# EAGLE board Slinea_velocistaEdu (EAGLE 6.4)
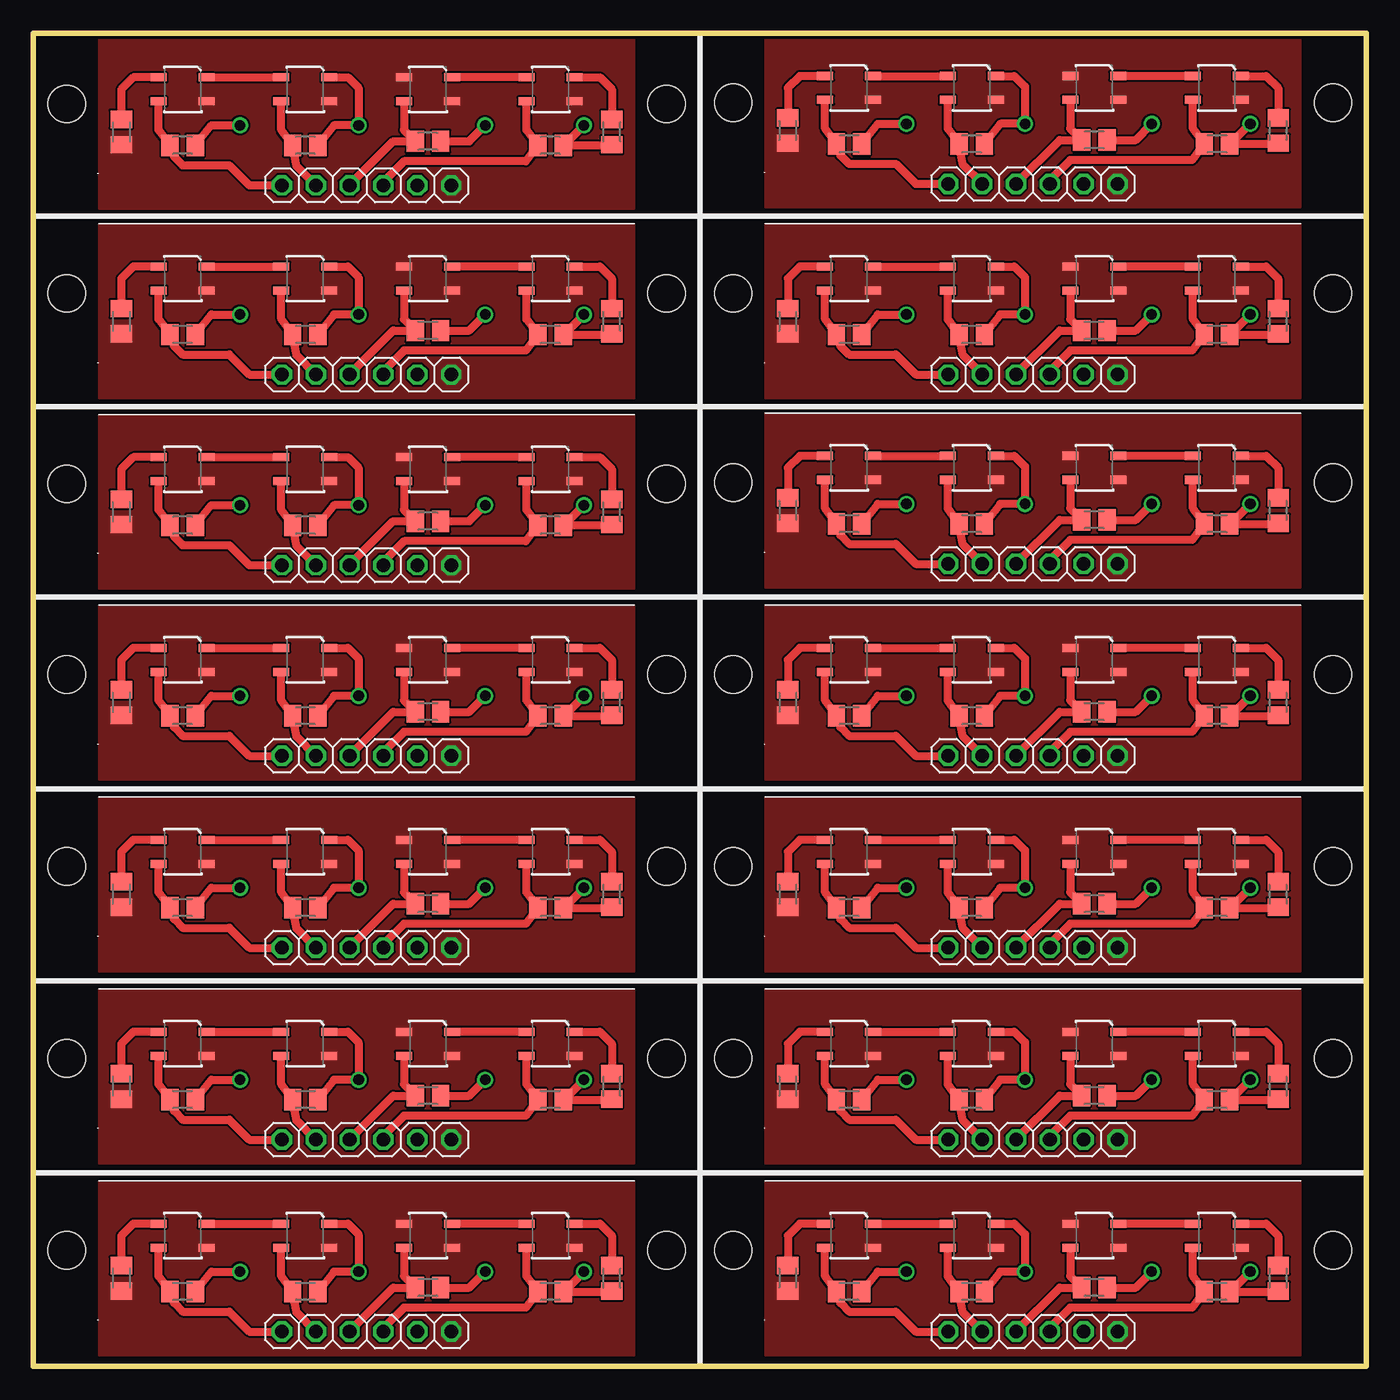
[diagram p0: board, top side]
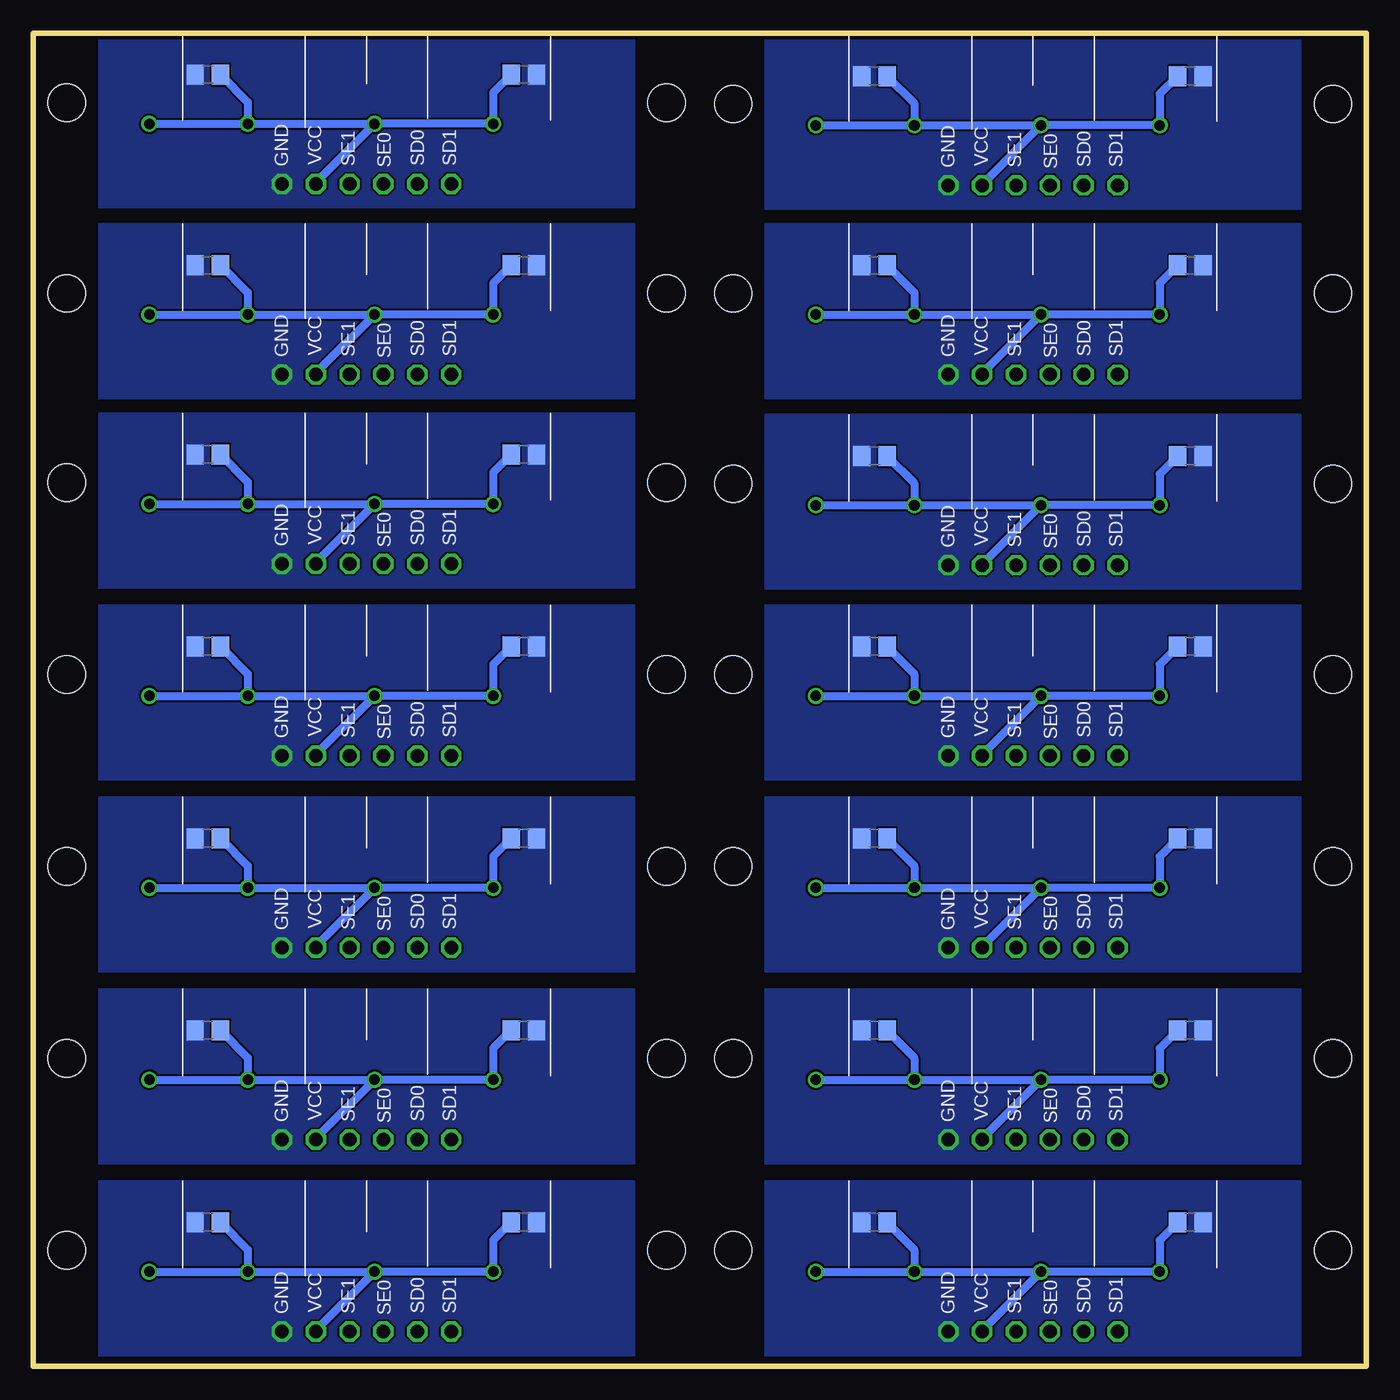
[diagram p1: board, bottom side, seen from below]

Size 100 x 100 mm. Coordinates in mm from the lower left corner, seen from the top.
Outline: 0,0 50,0 100,0 100,14.5 100,28.9 100,43.3 100,57.7 100,72 100,86.3 100,100 50,100 0,100 0,86.3 0,72 0,57.7 0,43.3 0,28.9 0,14.5 0,0
Copper layers (1*16): Top 0.035mm / dielectric 1.5mm / Bottom 0.035mm
Design rules "Fusion_eagle_rule_v1.1": minimum track width 6mil, minimum drill 12mil, track to track 6mil, track to pad 6mil, pad to pad 6mil, via to via 6mil, smd to smd 0mil, copper to edge 10mil, drill to drill 10mil, minimum pad ring 10mil, minimum via ring 6mil, stop-mask expansion 2mil, vias tented up to drill 100mil, thermal gap 10mil
Holes 2.8 mm at 2.5,8.7 47.5,8.7 52.5,8.7 97.5,8.7 2.5,23.1 47.5,23.1 52.5,23.1 97.5,23.1 2.5,37.5 47.5,37.5 52.5,37.5 97.5,37.5 2.5,51.9 47.5,51.9 52.5,51.9 97.5,51.9 2.5,66.2 47.5,66.2 52.5,66.3 97.5,66.3 2.5,80.5 47.5,80.5 52.5,80.5 97.5,80.5 2.5,94.7 47.5,94.7 52.5,94.8 97.5,94.8

## Footprints (pad centres in the part's own frame; a part is rotated, then mirrored left to right if it is on the bottom)
C0805 = smd 1.3 x 1.5: 1 -0.95,0; 2 0.95,0
1X06 = drill 1.016 octagon: 1 -6.35,0; 2 -3.81,0; 3 -1.27,0; 4 1.27,0; 5 3.81,0; 6 6.35,0
M0805 = smd 1.3 x 1.6: 1 -0.95,0; 2 0.95,0
QRE1113 = smd 1.2 x 0.6: 1 -1.8,-0.9; 2 1.8,-0.9; 3 1.8,0.9; 4 -1.8,0.9

## Placement (x,y rotation side)
CS1  [C0805]  86.9,10.8 180 bottom
CS2  [C0805]  63.2,10.8 0 bottom
CS3  [C0805]  36.9,10.8 180 bottom
CS4  [C0805]  13.2,10.8 0 bottom
CS5  [C0805]  36.9,25.2 180 bottom
CS6  [C0805]  13.2,25.2 0 bottom
CS7  [C0805]  86.9,25.2 180 bottom
CS8  [C0805]  63.2,25.2 0 bottom
CS9  [C0805]  36.9,39.6 180 bottom
CS10  [C0805]  13.2,39.6 0 bottom
CS11  [C0805]  86.9,39.6 180 bottom
CS12  [C0805]  63.2,39.6 0 bottom
CS13  [C0805]  36.9,54 180 bottom
CS14  [C0805]  13.2,54 0 bottom
CS15  [C0805]  86.9,54 180 bottom
CS16  [C0805]  63.2,54 0 bottom
CS17  [C0805]  36.9,68.3 180 bottom
CS18  [C0805]  13.2,68.3 0 bottom
CS19  [C0805]  86.9,68.4 180 bottom
CS20  [C0805]  63.2,68.4 0 bottom
CS21  [C0805]  36.9,82.6 180 bottom
CS22  [C0805]  13.2,82.6 0 bottom
CS23  [C0805]  86.9,82.6 180 bottom
CS24  [C0805]  63.2,82.6 0 bottom
CS25  [C0805]  36.9,96.8 180 bottom
CS26  [C0805]  13.2,96.8 0 bottom
CS27  [C0805]  86.9,96.9 180 bottom
CS28  [C0805]  63.2,96.9 0 bottom
JP1  [1X06]  75,2.6 0 top
JP2  [1X06]  25,17 0 top
JP3  [1X06]  75,17 0 top
JP4  [1X06]  25,31.4 0 top
JP5  [1X06]  75,31.4 0 top
JP6  [1X06]  25,45.8 0 top
JP7  [1X06]  75,45.8 0 top
JP8  [1X06]  25,60.1 0 top
JP9  [1X06]  75,60.2 0 top
JP10  [1X06]  25,2.6 0 top
JP11  [1X06]  25,74.4 0 top
JP12  [1X06]  75,74.4 0 top
JP13  [1X06]  25,88.6 0 top
JP14  [1X06]  75,88.7 0 top
R1  [M0805]  88.8,5.6 0 top
R2  [M0805]  79.6,5.9 0 top
R3  [M0805]  70.4,5.6 0 top
R4  [M0805]  61.2,5.6 0 top
R5  [M0805]  38.8,20 0 top
R6  [M0805]  29.6,20.3 0 top
R7  [M0805]  20.4,20 0 top
R8  [M0805]  11.2,20 0 top
R9  [M0805]  88.8,20 0 top
R10  [M0805]  79.6,20.3 0 top
R11  [M0805]  70.4,20 0 top
R12  [M0805]  61.2,20 0 top
R13  [M0805]  38.8,34.4 0 top
R14  [M0805]  29.6,34.7 0 top
R15  [M0805]  20.4,34.4 0 top
R16  [M0805]  11.2,34.4 0 top
R17  [M0805]  88.8,34.4 0 top
R18  [M0805]  79.6,34.7 0 top
R19  [M0805]  70.4,34.4 0 top
R20  [M0805]  38.8,5.6 0 top
R21  [M0805]  29.6,5.9 0 top
R22  [M0805]  20.4,5.6 0 top
R23  [M0805]  11.2,5.6 0 top
R24  [M0805]  61.2,34.4 0 top
R25  [M0805]  38.8,48.8 0 top
R26  [M0805]  29.6,49.1 0 top
R27  [M0805]  20.4,48.8 0 top
R28  [M0805]  11.2,48.8 0 top
R29  [M0805]  88.8,48.8 0 top
R30  [M0805]  79.6,49.1 0 top
R31  [M0805]  70.4,48.8 0 top
R32  [M0805]  61.2,48.8 0 top
R33  [M0805]  38.8,63.1 0 top
R34  [M0805]  29.6,63.4 0 top
R35  [M0805]  20.4,63.1 0 top
R36  [M0805]  11.2,63.1 0 top
R37  [M0805]  88.8,63.2 0 top
R38  [M0805]  79.6,63.5 0 top
R39  [M0805]  70.4,63.2 0 top
R40  [M0805]  61.2,63.2 0 top
R41  [M0805]  38.8,77.4 0 top
R42  [M0805]  29.6,77.7 0 top
R43  [M0805]  20.4,77.4 0 top
R44  [M0805]  11.2,77.4 0 top
R45  [M0805]  88.8,77.4 0 top
R46  [M0805]  79.6,77.7 0 top
R47  [M0805]  70.4,77.4 0 top
R48  [M0805]  61.2,77.4 0 top
R49  [M0805]  38.8,91.6 0 top
R50  [M0805]  29.6,91.9 0 top
R51  [M0805]  20.4,91.6 0 top
R52  [M0805]  11.2,91.6 0 top
R53  [M0805]  88.8,91.7 0 top
R54  [M0805]  79.6,92 0 top
R55  [M0805]  70.4,91.7 0 top
R56  [M0805]  61.2,91.7 0 top
RP1  [M0805]  93.4,6.6 270 top
RP2  [M0805]  56.6,6.6 90 top
RP3  [M0805]  43.4,6.6 270 top
RP4  [M0805]  6.6,6.6 90 top
RP5  [M0805]  43.4,21 270 top
RP6  [M0805]  6.6,21 90 top
RP7  [M0805]  93.4,21 270 top
RP8  [M0805]  56.6,21 90 top
RP9  [M0805]  43.4,35.4 270 top
RP10  [M0805]  6.6,35.4 90 top
RP11  [M0805]  93.4,35.4 270 top
RP12  [M0805]  56.6,35.4 90 top
RP13  [M0805]  43.4,49.8 270 top
RP14  [M0805]  6.6,49.8 90 top
RP15  [M0805]  93.4,49.8 270 top
RP16  [M0805]  56.6,49.8 90 top
RP17  [M0805]  43.4,64.1 270 top
RP18  [M0805]  6.6,64.1 90 top
RP19  [M0805]  93.4,64.2 270 top
RP20  [M0805]  56.6,64.2 90 top
RP21  [M0805]  43.4,78.4 270 top
RP22  [M0805]  6.6,78.4 90 top
RP23  [M0805]  93.4,78.4 270 top
RP24  [M0805]  56.6,78.4 90 top
RP25  [M0805]  43.4,92.6 270 top
RP26  [M0805]  6.6,92.6 90 top
RP27  [M0805]  93.4,92.7 270 top
RP28  [M0805]  56.6,92.7 90 top
U$1  QRE1113  [QRE1113]  88.8,9.8 180 top
U$2  QRE1113  [QRE1113]  38.8,9.8 180 top
U$3  QRE1113  [QRE1113]  79.6,9.8 180 top
U$4  QRE1113  [QRE1113]  29.6,9.8 180 top
U$5  QRE1113  [QRE1113]  70.4,9.8 180 top
U$6  QRE1113  [QRE1113]  61.2,9.8 180 top
U$7  QRE1113  [QRE1113]  20.4,9.8 180 top
U$8  QRE1113  [QRE1113]  38.8,24.2 180 top
U$9  QRE1113  [QRE1113]  29.6,24.2 180 top
U$10  QRE1113  [QRE1113]  11.2,9.8 180 top
U$11  QRE1113  [QRE1113]  20.4,24.2 180 top
U$12  QRE1113  [QRE1113]  11.2,24.2 180 top
U$13  QRE1113  [QRE1113]  88.8,24.2 180 top
U$14  QRE1113  [QRE1113]  79.6,24.2 180 top
U$15  QRE1113  [QRE1113]  70.4,24.2 180 top
U$16  QRE1113  [QRE1113]  61.2,24.2 180 top
U$17  QRE1113  [QRE1113]  38.8,38.6 180 top
U$18  QRE1113  [QRE1113]  29.6,38.6 180 top
U$19  QRE1113  [QRE1113]  20.4,38.6 180 top
U$20  QRE1113  [QRE1113]  11.2,38.6 180 top
U$21  QRE1113  [QRE1113]  88.8,38.6 180 top
U$22  QRE1113  [QRE1113]  79.6,38.6 180 top
U$23  QRE1113  [QRE1113]  70.4,38.6 180 top
U$24  QRE1113  [QRE1113]  61.2,38.6 180 top
U$25  QRE1113  [QRE1113]  38.8,53 180 top
U$26  QRE1113  [QRE1113]  29.6,53 180 top
U$27  QRE1113  [QRE1113]  20.4,53 180 top
U$28  QRE1113  [QRE1113]  11.2,53 180 top
U$29  QRE1113  [QRE1113]  88.8,53 180 top
U$30  QRE1113  [QRE1113]  79.6,53 180 top
U$31  QRE1113  [QRE1113]  70.4,53 180 top
U$32  QRE1113  [QRE1113]  61.2,53 180 top
U$33  QRE1113  [QRE1113]  38.8,67.3 180 top
U$34  QRE1113  [QRE1113]  29.6,67.3 180 top
U$35  QRE1113  [QRE1113]  20.4,67.3 180 top
U$36  QRE1113  [QRE1113]  11.2,67.3 180 top
U$37  QRE1113  [QRE1113]  88.8,67.4 180 top
U$38  QRE1113  [QRE1113]  79.6,67.4 180 top
U$39  QRE1113  [QRE1113]  70.4,67.4 180 top
U$40  QRE1113  [QRE1113]  61.2,67.4 180 top
U$41  QRE1113  [QRE1113]  38.8,81.6 180 top
U$42  QRE1113  [QRE1113]  29.6,81.6 180 top
U$43  QRE1113  [QRE1113]  20.4,81.6 180 top
U$44  QRE1113  [QRE1113]  11.2,81.6 180 top
U$45  QRE1113  [QRE1113]  88.8,81.6 180 top
U$46  QRE1113  [QRE1113]  79.6,81.6 180 top
U$47  QRE1113  [QRE1113]  70.4,81.6 180 top
U$48  QRE1113  [QRE1113]  61.2,81.6 180 top
U$49  QRE1113  [QRE1113]  38.8,95.8 180 top
U$50  QRE1113  [QRE1113]  29.6,95.8 180 top
U$51  QRE1113  [QRE1113]  20.4,95.8 180 top
U$52  QRE1113  [QRE1113]  11.2,95.8 180 top
U$53  QRE1113  [QRE1113]  88.8,95.9 180 top
U$54  QRE1113  [QRE1113]  79.6,95.9 180 top
U$55  QRE1113  [QRE1113]  70.4,95.9 180 top
U$56  QRE1113  [QRE1113]  61.2,95.9 180 top

## Library data of the parts
CS1-CS28 R2-R4 R6-R8 R10-R12 R14-R16 R18 R19 R21-R24 R26-R28 R30-R32 R34-R36 R38-R40 R42-R44 R46-R48 R50-R52 R54-R56 RP1-RP28 = rcl
JP1-JP14 = adafruit
R1 R5 R9 R13 R17 R20 R25 R29 R33 R37 R41 R45 R49 R53 = resistor
U$1-U$56 = SparkFun

## Nets
+VS1: CS1.1 CS2.1 JP1.5 R1.2 R2.2 R3.2 R4.2 RP1.2 U$5.1
+VS2: CS3.1 CS4.1 JP10.5 R20.2 R21.2 R22.2 R23.2 RP3.2 U$7.1
+VS3: CS5.1 CS6.1 JP2.5 R5.2 R6.2 R7.2 R8.2 RP5.2 U$11.1
+VS4: CS7.1 CS8.1 JP3.5 R9.2 R10.2 R11.2 R12.2 RP7.2 U$15.1
+VS5: CS9.1 CS10.1 JP4.5 R13.2 R14.2 R15.2 R16.2 RP9.2 U$19.1
+VS6: CS11.1 CS12.1 JP5.5 R17.2 R18.2 R19.2 R24.2 RP11.2 U$23.1
+VS7: CS13.1 CS14.1 JP6.5 R25.2 R26.2 R27.2 R28.2 RP13.2 U$27.1
+VS8: CS15.1 CS16.1 JP7.5 R29.2 R30.2 R31.2 R32.2 RP15.2 U$31.1
+VS9: CS17.1 CS18.1 JP8.5 R33.2 R34.2 R35.2 R36.2 RP17.2 U$35.1
+VS10: CS19.1 CS20.1 JP9.5 R37.2 R38.2 R39.2 R40.2 RP19.2 U$39.1
+VS11: CS21.1 CS22.1 JP11.5 R41.2 R42.2 R43.2 R44.2 RP21.2 U$43.1
+VS12: CS23.1 CS24.1 JP12.5 R45.2 R46.2 R47.2 R48.2 RP23.2 U$47.1
+VS13: CS25.1 CS26.1 JP13.5 R49.2 R50.2 R51.2 R52.2 RP25.2 U$51.1
+VS14: CS27.1 CS28.1 JP14.5 R53.2 R54.2 R55.2 R56.2 RP27.2 U$55.1
GNDS1: CS1.2 CS2.2 JP1.6 RP2.1 U$1.4 U$3.2 U$3.4 U$5.4 U$6.4
GNDS2: CS3.2 CS4.2 JP10.6 RP4.1 U$2.4 U$4.2 U$4.4 U$7.4 U$10.4
GNDS3: CS5.2 CS6.2 JP2.6 RP6.1 U$8.4 U$9.2 U$9.4 U$11.4 U$12.4
GNDS4: CS7.2 CS8.2 JP3.6 RP8.1 U$13.4 U$14.2 U$14.4 U$15.4 U$16.4
GNDS5: CS9.2 CS10.2 JP4.6 RP10.1 U$17.4 U$18.2 U$18.4 U$19.4 U$20.4
GNDS6: CS11.2 CS12.2 JP5.6 RP12.1 U$21.4 U$22.2 U$22.4 U$23.4 U$24.4
GNDS7: CS13.2 CS14.2 JP6.6 RP14.1 U$25.4 U$26.2 U$26.4 U$27.4 U$28.4
GNDS8: CS15.2 CS16.2 JP7.6 RP16.1 U$29.4 U$30.2 U$30.4 U$31.4 U$32.4
GNDS9: CS17.2 CS18.2 JP8.6 RP18.1 U$33.4 U$34.2 U$34.4 U$35.4 U$36.4
GNDS10: CS19.2 CS20.2 JP9.6 RP20.1 U$37.4 U$38.2 U$38.4 U$39.4 U$40.4
GNDS11: CS21.2 CS22.2 JP11.6 RP22.1 U$41.4 U$42.2 U$42.4 U$43.4 U$44.4
GNDS12: CS23.2 CS24.2 JP12.6 RP24.1 U$45.4 U$46.2 U$46.4 U$47.4 U$48.4
GNDS13: CS25.2 CS26.2 JP13.6 RP26.1 U$49.4 U$50.2 U$50.4 U$51.4 U$52.4
GNDS14: CS27.2 CS28.2 JP14.6 RP28.1 U$53.4 U$54.2 U$54.4 U$55.4 U$56.4
N$1: U$1.2 U$3.1
N$2: U$5.2 U$6.1
N$3: RP2.2 U$6.2
N$4: RP1.1 U$1.1
N$5: U$8.2 U$9.1
N$6: U$11.2 U$12.1
N$7: RP6.2 U$12.2
N$8: RP5.1 U$8.1
N$9: U$13.2 U$14.1
N$10: U$15.2 U$16.1
N$11: RP8.2 U$16.2
N$12: RP7.1 U$13.1
N$13: U$17.2 U$18.1
N$14: U$19.2 U$20.1
N$15: RP10.2 U$20.2
N$16: RP9.1 U$17.1
N$17: U$21.2 U$22.1
N$18: U$23.2 U$24.1
N$19: RP12.2 U$24.2
N$20: RP11.1 U$21.1
N$21: U$25.2 U$26.1
N$22: U$27.2 U$28.1
N$23: RP14.2 U$28.2
N$24: RP13.1 U$25.1
N$25: U$29.2 U$30.1
N$26: U$31.2 U$32.1
N$27: RP16.2 U$32.2
N$28: RP15.1 U$29.1
N$29: U$33.2 U$34.1
N$30: U$35.2 U$36.1
N$31: RP18.2 U$36.2
N$32: RP17.1 U$33.1
N$33: U$37.2 U$38.1
N$34: U$39.2 U$40.1
N$35: RP20.2 U$40.2
N$36: RP19.1 U$37.1
N$37: U$41.2 U$42.1
N$38: U$43.2 U$44.1
N$39: RP22.2 U$44.2
N$40: RP21.1 U$41.1
N$41: U$45.2 U$46.1
N$42: U$47.2 U$48.1
N$43: RP24.2 U$48.2
N$44: RP23.1 U$45.1
N$45: U$49.2 U$50.1
N$46: U$51.2 U$52.1
N$47: RP26.2 U$52.2
N$48: RP25.1 U$49.1
N$49: U$53.2 U$54.1
N$50: U$55.2 U$56.1
N$51: RP28.2 U$56.2
N$52: RP27.1 U$53.1
N$63: U$2.2 U$4.1
N$65: U$7.2 U$10.1
N$66: RP4.2 U$10.2
N$67: RP3.1 U$2.1
SD0+: JP10.2 R22.1 U$7.3
SD0+1: JP1.2 R3.1 U$5.3
SD0+2: JP2.2 R7.1 U$11.3
SD0+3: JP3.2 R11.1 U$15.3
SD0+4: JP4.2 R15.1 U$19.3
SD0+5: JP5.2 R19.1 U$23.3
SD0+6: JP6.2 R27.1 U$27.3
SD0+7: JP7.2 R31.1 U$31.3
SD0+8: JP8.2 R35.1 U$35.3
SD0+9: JP9.2 R39.1 U$39.3
SD0+10: JP11.2 R43.1 U$43.3
SD0+11: JP12.2 R47.1 U$47.3
SD0+12: JP13.2 R51.1 U$51.3
SD0+13: JP14.2 R55.1 U$55.3
SD1+: JP10.1 R23.1 U$10.3
SD1+1: JP1.1 R4.1 U$6.3
SD1+2: JP2.1 R8.1 U$12.3
SD1+3: JP3.1 R12.1 U$16.3
SD1+4: JP4.1 R16.1 U$20.3
SD1+5: JP5.1 R24.1 U$24.3
SD1+6: JP6.1 R28.1 U$28.3
SD1+7: JP7.1 R32.1 U$32.3
SD1+8: JP8.1 R36.1 U$36.3
SD1+9: JP9.1 R40.1 U$40.3
SD1+10: JP11.1 R44.1 U$44.3
SD1+11: JP12.1 R48.1 U$48.3
SD1+12: JP13.1 R52.1 U$52.3
SD1+13: JP14.1 R56.1 U$56.3
SE0+: JP10.3 R21.1 U$4.3
SE0+1: JP1.3 R2.1 U$3.3
SE0+2: JP2.3 R6.1 U$9.3
SE0+3: JP3.3 R10.1 U$14.3
SE0+4: JP4.3 R14.1 U$18.3
SE0+5: JP5.3 R18.1 U$22.3
SE0+6: JP6.3 R26.1 U$26.3
SE0+7: JP7.3 R30.1 U$30.3
SE0+8: JP8.3 R34.1 U$34.3
SE0+9: JP9.3 R38.1 U$38.3
SE0+10: JP11.3 R42.1 U$42.3
SE0+11: JP12.3 R46.1 U$46.3
SE0+12: JP13.3 R50.1 U$50.3
SE0+13: JP14.3 R54.1 U$54.3
SE1+: JP10.4 R20.1 U$2.3
SE1+1: JP1.4 R1.1 U$1.3
SE1+2: JP2.4 R5.1 U$8.3
SE1+3: JP3.4 R9.1 U$13.3
SE1+4: JP4.4 R13.1 U$17.3
SE1+5: JP5.4 R17.1 U$21.3
SE1+6: JP6.4 R25.1 U$25.3
SE1+7: JP7.4 R29.1 U$29.3
SE1+8: JP8.4 R33.1 U$33.3
SE1+9: JP9.4 R37.1 U$37.3
SE1+10: JP11.4 R41.1 U$41.3
SE1+11: JP12.4 R45.1 U$45.3
SE1+12: JP13.4 R49.1 U$49.3
SE1+13: JP14.4 R53.1 U$53.3

## Tracks (layer width: path | path; a pad name or v marks a point on that pad's centre or on a via)
+VS1  (via drill 0.8)
  Top 0.61: R3.2 72.55,7.1 v74.4,7.1 74.4,9.9 73.6,10.7 U$5.1 | R2.2 82.7,5.9 v83.9,7.1 | RP1.2 93.05,5.6 R1.2 89.8,5.6 v91.3,7.1 | R4.2 63.35,7.1 v65.5,7.1
  Bottom 0.61: JP1.5 78.81,2.69 v74.4,7.1 | v83.9,7.1 v74.4,7.1 | v91.3,7.1 v83.9,7.1 | v74.4,7.1 v65.5,7.1 65.5,9.45 CS2.1 | CS1.1 83.9,8.75 v83.9,7.1
+VS2  (via drill 0.8)
  Top 0.61: R22.2 22.55,7.1 v24.4,7.1 24.4,9.9 23.6,10.7 U$7.1 | R21.2 32.7,5.9 v33.9,7.1 | RP3.2 43.05,5.6 R20.2 39.8,5.6 v41.3,7.1 | R23.2 13.35,7.1 v15.5,7.1
  Bottom 0.61: JP10.5 28.81,2.69 v24.4,7.1 | v33.9,7.1 v24.4,7.1 | v41.3,7.1 v33.9,7.1 | v24.4,7.1 v15.5,7.1 15.5,9.45 CS4.1 | CS3.1 33.9,8.75 v33.9,7.1
+VS3  (via drill 0.8)
  Top 0.61: R7.2 22.55,21.5 v24.4,21.5 24.4,24.3 23.6,25.1 U$11.1 | R6.2 32.7,20.3 v33.9,21.5 | RP5.2 43.05,20 R5.2 39.8,20 v41.3,21.5 | R8.2 13.35,21.5 v15.5,21.5
  Bottom 0.61: JP2.5 28.81,17.09 v24.4,21.5 | v33.9,21.5 v24.4,21.5 | v41.3,21.5 v33.9,21.5 | v24.4,21.5 v15.5,21.5 15.5,23.85 CS6.1 | CS5.1 33.9,23.15 v33.9,21.5
+VS4  (via drill 0.8)
  Top 0.61: R11.2 72.55,21.5 v74.4,21.5 74.4,24.3 73.6,25.1 U$15.1 | R10.2 82.7,20.3 v83.9,21.5 | RP7.2 93.05,20 R9.2 89.8,20 v91.3,21.5 | R12.2 63.35,21.5 v65.5,21.5
  Bottom 0.61: JP3.5 78.81,17.09 v74.4,21.5 | v83.9,21.5 v74.4,21.5 | v91.3,21.5 v83.9,21.5 | v74.4,21.5 v65.5,21.5 65.5,23.85 CS8.1 | CS7.1 83.9,23.15 v83.9,21.5
+VS5  (via drill 0.8)
  Top 0.61: R15.2 22.55,35.9 v24.4,35.9 24.4,38.7 23.6,39.5 U$19.1 | R14.2 32.7,34.7 v33.9,35.9 | RP9.2 43.05,34.4 R13.2 39.8,34.4 v41.3,35.9 | R16.2 13.35,35.9 v15.5,35.9
  Bottom 0.61: JP4.5 28.81,31.49 v24.4,35.9 | v33.9,35.9 v24.4,35.9 | v41.3,35.9 v33.9,35.9 | v24.4,35.9 v15.5,35.9 15.5,38.25 CS10.1 | CS9.1 33.9,37.55 v33.9,35.9
+VS6  (via drill 0.8)
  Top 0.61: R19.2 72.55,35.9 v74.4,35.9 74.4,38.7 73.6,39.5 U$23.1 | R18.2 82.7,34.7 v83.9,35.9 | RP11.2 93.05,34.4 R17.2 89.8,34.4 v91.3,35.9 | R24.2 63.35,35.9 v65.5,35.9
  Bottom 0.61: JP5.5 78.81,31.49 v74.4,35.9 | v83.9,35.9 v74.4,35.9 | v91.3,35.9 v83.9,35.9 | v74.4,35.9 v65.5,35.9 65.5,38.25 CS12.1 | CS11.1 83.9,37.55 v83.9,35.9
+VS7  (via drill 0.8)
  Top 0.61: R27.2 22.55,50.3 v24.4,50.3 24.4,53.1 23.6,53.9 U$27.1 | R26.2 32.7,49.1 v33.9,50.3 | RP13.2 43.05,48.8 R25.2 39.8,48.8 v41.3,50.3 | R28.2 13.35,50.3 v15.5,50.3
  Bottom 0.61: JP6.5 28.81,45.89 v24.4,50.3 | v33.9,50.3 v24.4,50.3 | v41.3,50.3 v33.9,50.3 | v24.4,50.3 v15.5,50.3 15.5,52.65 CS14.1 | CS13.1 33.9,51.95 v33.9,50.3
+VS8  (via drill 0.8)
  Top 0.61: R31.2 72.55,50.3 v74.4,50.3 74.4,53.1 73.6,53.9 U$31.1 | R30.2 82.7,49.1 v83.9,50.3 | RP15.2 93.05,48.8 R29.2 89.8,48.8 v91.3,50.3 | R32.2 63.35,50.3 v65.5,50.3
  Bottom 0.61: JP7.5 78.81,45.89 v74.4,50.3 | v83.9,50.3 v74.4,50.3 | v91.3,50.3 v83.9,50.3 | v74.4,50.3 v65.5,50.3 65.5,52.65 CS16.1 | CS15.1 83.9,51.95 v83.9,50.3
+VS9  (via drill 0.8)
  Top 0.61: R35.2 22.55,64.6 v24.4,64.6 24.4,67.4 23.6,68.2 U$35.1 | R34.2 32.7,63.4 v33.9,64.6 | RP17.2 43.05,63.1 R33.2 39.8,63.1 v41.3,64.6 | R36.2 13.35,64.6 v15.5,64.6
  Bottom 0.61: JP8.5 28.81,60.19 v24.4,64.6 | v33.9,64.6 v24.4,64.6 | v41.3,64.6 v33.9,64.6 | v24.4,64.6 v15.5,64.6 15.5,66.95 CS18.1 | CS17.1 33.9,66.25 v33.9,64.6
+VS10  (via drill 0.8)
  Top 0.61: R39.2 72.55,64.7 v74.4,64.7 74.4,67.5 73.6,68.3 U$39.1 | R38.2 82.7,63.5 v83.9,64.7 | RP19.2 93.05,63.2 R37.2 89.8,63.2 v91.3,64.7 | R40.2 63.35,64.7 v65.5,64.7
  Bottom 0.61: JP9.5 78.81,60.29 v74.4,64.7 | v83.9,64.7 v74.4,64.7 | v91.3,64.7 v83.9,64.7 | v74.4,64.7 v65.5,64.7 65.5,67.05 CS20.1 | CS19.1 83.9,66.35 v83.9,64.7
+VS11  (via drill 0.8)
  Top 0.61: R43.2 22.55,78.9 v24.4,78.9 24.4,81.7 23.6,82.5 U$43.1 | R42.2 32.7,77.7 v33.9,78.9 | RP21.2 43.05,77.4 R41.2 39.8,77.4 v41.3,78.9 | R44.2 13.35,78.9 v15.5,78.9
  Bottom 0.61: JP11.5 28.81,74.49 v24.4,78.9 | v33.9,78.9 v24.4,78.9 | v41.3,78.9 v33.9,78.9 | v24.4,78.9 v15.5,78.9 15.5,81.25 CS22.1 | CS21.1 33.9,80.55 v33.9,78.9
+VS12  (via drill 0.8)
  Top 0.61: R47.2 72.55,78.9 v74.4,78.9 74.4,81.7 73.6,82.5 U$47.1 | R46.2 82.7,77.7 v83.9,78.9 | RP23.2 93.05,77.4 R45.2 89.8,77.4 v91.3,78.9 | R48.2 63.35,78.9 v65.5,78.9
  Bottom 0.61: JP12.5 78.81,74.49 v74.4,78.9 | v83.9,78.9 v74.4,78.9 | v91.3,78.9 v83.9,78.9 | v74.4,78.9 v65.5,78.9 65.5,81.25 CS24.1 | CS23.1 83.9,80.55 v83.9,78.9
+VS13  (via drill 0.8)
  Top 0.61: R51.2 22.55,93.1 v24.4,93.1 24.4,95.9 23.6,96.7 U$51.1 | R50.2 32.7,91.9 v33.9,93.1 | RP25.2 43.05,91.6 R49.2 39.8,91.6 v41.3,93.1 | R52.2 13.35,93.1 v15.5,93.1
  Bottom 0.61: JP13.5 28.81,88.69 v24.4,93.1 | v33.9,93.1 v24.4,93.1 | v41.3,93.1 v33.9,93.1 | v24.4,93.1 v15.5,93.1 15.5,95.45 CS26.1 | CS25.1 33.9,94.75 v33.9,93.1
+VS14  (via drill 0.8)
  Top 0.61: R55.2 72.55,93.2 v74.4,93.2 74.4,96 73.6,96.8 U$55.1 | R54.2 82.7,92 v83.9,93.2 | RP27.2 93.05,91.7 R53.2 89.8,91.7 v91.3,93.2 | R56.2 63.35,93.2 v65.5,93.2
  Bottom 0.61: JP14.5 78.81,88.79 v74.4,93.2 | v83.9,93.2 v74.4,93.2 | v91.3,93.2 v83.9,93.2 | v74.4,93.2 v65.5,93.2 65.5,95.55 CS28.1 | CS27.1 83.9,94.85 v83.9,93.2
GNDS1
  pour Top (no thermals): 95.1,0.8 54.9,0.8 54.9,13.9 95.1,13.9
  pour Bottom (no thermals): 95.1,0.8 54.9,0.8 54.9,13.9 95.1,13.9
GNDS2
  pour Top (no thermals): 45.1,0.8 4.9,0.8 4.9,13.9 45.1,13.9
  pour Bottom (no thermals): 45.1,0.8 4.9,0.8 4.9,13.9 45.1,13.9
GNDS3
  pour Top (no thermals): 45.1,15.2 4.9,15.2 4.9,28.3 45.1,28.3
  pour Bottom (no thermals): 45.1,15.2 4.9,15.2 4.9,28.3 45.1,28.3
GNDS4
  pour Top (no thermals): 95.1,15.2 54.9,15.2 54.9,28.3 95.1,28.3
  pour Bottom (no thermals): 95.1,15.2 54.9,15.2 54.9,28.3 95.1,28.3
GNDS5
  pour Top (no thermals): 45.1,29.6 4.9,29.6 4.9,42.7 45.1,42.7
  pour Bottom (no thermals): 45.1,29.6 4.9,29.6 4.9,42.7 45.1,42.7
GNDS6
  pour Top (no thermals): 95.1,29.6 54.9,29.6 54.9,42.7 95.1,42.7
  pour Bottom (no thermals): 95.1,29.6 54.9,29.6 54.9,42.7 95.1,42.7
GNDS7
  pour Top (no thermals): 45.1,44 4.9,44 4.9,57.1 45.1,57.1
  pour Bottom (no thermals): 45.1,44 4.9,44 4.9,57.1 45.1,57.1
GNDS8
  pour Top (no thermals): 95.1,44 54.9,44 54.9,57.1 95.1,57.1
  pour Bottom (no thermals): 95.1,44 54.9,44 54.9,57.1 95.1,57.1
GNDS9
  pour Top (no thermals): 45.1,58.3 4.9,58.3 4.9,71.4 45.1,71.4
  pour Bottom (no thermals): 45.1,58.3 4.9,58.3 4.9,71.4 45.1,71.4
GNDS10
  pour Top (no thermals): 95.1,58.4 54.9,58.4 54.9,71.5 95.1,71.5
  pour Bottom (no thermals): 95.1,58.4 54.9,58.4 54.9,71.5 95.1,71.5
GNDS11
  pour Top (no thermals): 45.1,72.6 4.9,72.6 4.9,85.7 45.1,85.7
  pour Bottom (no thermals): 45.1,72.6 4.9,72.6 4.9,85.7 45.1,85.7
GNDS12
  pour Top (no thermals): 95.1,72.6 54.9,72.6 54.9,85.7 95.1,85.7
  pour Bottom (no thermals): 95.1,72.6 54.9,72.6 54.9,85.7 95.1,85.7
GNDS13
  pour Top (no thermals): 45.1,86.8 4.9,86.8 4.9,99.9 45.1,99.9
  pour Bottom (no thermals): 45.1,86.8 4.9,86.8 4.9,99.9 45.1,99.9
GNDS14
  pour Top (no thermals): 95.1,86.9 54.9,86.9 54.9,100 95.1,100
  pour Bottom (no thermals): 95.1,86.9 54.9,86.9 54.9,100 95.1,100
N$1
  Top 0.61: U$1.2 U$3.1
N$2
  Top 0.61: U$6.1 U$5.2
N$3
  Top 0.61: U$6.2 57.5,10.7 56.6,9.8 RP2.2
N$4
  Top 0.61: U$1.1 92.5,10.7 93.4,9.8 RP1.1
N$5
  Top 0.61: U$8.2 U$9.1
N$6
  Top 0.61: U$12.1 U$11.2
N$7
  Top 0.61: U$12.2 7.5,25.1 6.6,24.2 RP6.2
N$8
  Top 0.61: U$8.1 42.5,25.1 43.4,24.2 RP5.1
N$9
  Top 0.61: U$13.2 U$14.1
N$10
  Top 0.61: U$16.1 U$15.2
N$11
  Top 0.61: U$16.2 57.5,25.1 56.6,24.2 RP8.2
N$12
  Top 0.61: U$13.1 92.5,25.1 93.4,24.2 RP7.1
N$13
  Top 0.61: U$17.2 U$18.1
N$14
  Top 0.61: U$20.1 U$19.2
N$15
  Top 0.61: U$20.2 7.5,39.5 6.6,38.6 RP10.2
N$16
  Top 0.61: U$17.1 42.5,39.5 43.4,38.6 RP9.1
N$17
  Top 0.61: U$21.2 U$22.1
N$18
  Top 0.61: U$24.1 U$23.2
N$19
  Top 0.61: U$24.2 57.5,39.5 56.6,38.6 RP12.2
N$20
  Top 0.61: U$21.1 92.5,39.5 93.4,38.6 RP11.1
N$21
  Top 0.61: U$25.2 U$26.1
N$22
  Top 0.61: U$28.1 U$27.2
N$23
  Top 0.61: U$28.2 7.5,53.9 6.6,53 RP14.2
N$24
  Top 0.61: U$25.1 42.5,53.9 43.4,53 RP13.1
N$25
  Top 0.61: U$29.2 U$30.1
N$26
  Top 0.61: U$32.1 U$31.2
N$27
  Top 0.61: U$32.2 57.5,53.9 56.6,53 RP16.2
N$28
  Top 0.61: U$29.1 92.5,53.9 93.4,53 RP15.1
N$29
  Top 0.61: U$33.2 U$34.1
N$30
  Top 0.61: U$36.1 U$35.2
N$31
  Top 0.61: U$36.2 7.5,68.2 6.6,67.3 RP18.2
N$32
  Top 0.61: U$33.1 42.5,68.2 43.4,67.3 RP17.1
N$33
  Top 0.61: U$37.2 U$38.1
N$34
  Top 0.61: U$40.1 U$39.2
N$35
  Top 0.61: U$40.2 57.5,68.3 56.6,67.4 RP20.2
N$36
  Top 0.61: U$37.1 92.5,68.3 93.4,67.4 RP19.1
N$37
  Top 0.61: U$41.2 U$42.1
N$38
  Top 0.61: U$44.1 U$43.2
N$39
  Top 0.61: U$44.2 7.5,82.5 6.6,81.6 RP22.2
N$40
  Top 0.61: U$41.1 42.5,82.5 43.4,81.6 RP21.1
N$41
  Top 0.61: U$45.2 U$46.1
N$42
  Top 0.61: U$48.1 U$47.2
N$43
  Top 0.61: U$48.2 57.5,82.5 56.6,81.6 RP24.2
N$44
  Top 0.61: U$45.1 92.5,82.5 93.4,81.6 RP23.1
N$45
  Top 0.61: U$49.2 U$50.1
N$46
  Top 0.61: U$52.1 U$51.2
N$47
  Top 0.61: U$52.2 7.5,96.7 6.6,95.8 RP26.2
N$48
  Top 0.61: U$49.1 42.5,96.7 43.4,95.8 RP25.1
N$49
  Top 0.61: U$53.2 U$54.1
N$50
  Top 0.61: U$56.1 U$55.2
N$51
  Top 0.61: U$56.2 57.5,96.8 56.6,95.9 RP28.2
N$52
  Top 0.61: U$53.1 92.5,96.8 93.4,95.9 RP27.1
N$63
  Top 0.61: U$2.2 U$4.1
N$65
  Top 0.61: U$10.1 U$7.2
N$66
  Top 0.61: U$10.2 7.5,10.7 6.6,9.8 RP4.2
N$67
  Top 0.61: U$2.1 42.5,10.7 43.4,9.8 RP3.1
SD0+
  Top 0.61: U$7.3 18.6,6.75 R22.1 19.75,4.04 JP10.2
SD0+1
  Top 0.61: U$5.3 68.6,6.75 R3.1 69.75,4.04 JP1.2
SD0+2
  Top 0.61: U$11.3 18.6,21.15 R7.1 19.75,18.44 JP2.2
SD0+3
  Top 0.61: U$15.3 68.6,21.15 R11.1 69.75,18.44 JP3.2
SD0+4
  Top 0.61: U$19.3 18.6,35.55 R15.1 19.75,32.84 JP4.2
SD0+5
  Top 0.61: U$23.3 68.6,35.55 R19.1 69.75,32.84 JP5.2
SD0+6
  Top 0.61: U$27.3 18.6,49.95 R27.1 19.75,47.24 JP6.2
SD0+7
  Top 0.61: U$31.3 68.6,49.95 R31.1 69.75,47.24 JP7.2
SD0+8
  Top 0.61: U$35.3 18.6,64.25 R35.1 19.75,61.54 JP8.2
SD0+9
  Top 0.61: U$39.3 68.6,64.35 R39.1 69.75,61.64 JP9.2
SD0+10
  Top 0.61: U$43.3 18.6,78.55 R43.1 19.75,75.84 JP11.2
SD0+11
  Top 0.61: U$47.3 68.6,78.55 R47.1 69.75,75.84 JP12.2
SD0+12
  Top 0.61: U$51.3 18.6,92.75 R51.1 19.75,90.04 JP13.2
SD0+13
  Top 0.61: U$55.3 68.6,92.85 R55.1 69.75,90.14 JP14.2
SD1+
  Top 0.61: U$10.3 9.4,6.75 R23.1 10.55,4.75 11.2,4.1 14.7,4.1 16.2,2.6 JP10.1
SD1+1
  Top 0.61: U$6.3 59.4,6.75 R4.1 60.55,4.75 61.2,4.1 64.7,4.1 66.2,2.6 JP1.1
SD1+2
  Top 0.61: U$12.3 9.4,21.15 R8.1 10.55,19.15 11.2,18.5 14.7,18.5 16.2,17 JP2.1
SD1+3
  Top 0.61: U$16.3 59.4,21.15 R12.1 60.55,19.15 61.2,18.5 64.7,18.5 66.2,17 JP3.1
SD1+4
  Top 0.61: U$20.3 9.4,35.55 R16.1 10.55,33.55 11.2,32.9 14.7,32.9 16.2,31.4 JP4.1
SD1+5
  Top 0.61: U$24.3 59.4,35.55 R24.1 60.55,33.55 61.2,32.9 64.7,32.9 66.2,31.4 JP5.1
SD1+6
  Top 0.61: U$28.3 9.4,49.95 R28.1 10.55,47.95 11.2,47.3 14.7,47.3 16.2,45.8 JP6.1
SD1+7
  Top 0.61: U$32.3 59.4,49.95 R32.1 60.55,47.95 61.2,47.3 64.7,47.3 66.2,45.8 JP7.1
SD1+8
  Top 0.61: U$36.3 9.4,64.25 R36.1 10.55,62.25 11.2,61.6 14.7,61.6 16.2,60.1 JP8.1
SD1+9
  Top 0.61: U$40.3 59.4,64.35 R40.1 60.55,62.35 61.2,61.7 64.7,61.7 66.2,60.2 JP9.1
SD1+10
  Top 0.61: U$44.3 9.4,78.55 R44.1 10.55,76.55 11.2,75.9 14.7,75.9 16.2,74.4 JP11.1
SD1+11
  Top 0.61: U$48.3 59.4,78.55 R48.1 60.55,76.55 61.2,75.9 64.7,75.9 66.2,74.4 JP12.1
SD1+12
  Top 0.61: U$52.3 9.4,92.75 R52.1 10.55,90.75 11.2,90.1 14.7,90.1 16.2,88.6 JP13.1
SD1+13
  Top 0.61: U$56.3 59.4,92.85 R56.1 60.55,90.85 61.2,90.2 64.7,90.2 66.2,88.7 JP14.1
SE0+
  Top 0.61: U$4.3 27.8,6.75 R21.1 27,5.9 23.73,2.63 JP10.3
SE0+1
  Top 0.61: U$3.3 77.8,6.75 R2.1 77,5.9 73.73,2.63 JP1.3
SE0+2
  Top 0.61: U$9.3 27.8,21.15 R6.1 27,20.3 23.73,17.03 JP2.3
SE0+3
  Top 0.61: U$14.3 77.8,21.15 R10.1 77,20.3 73.73,17.03 JP3.3
SE0+4
  Top 0.61: U$18.3 27.8,35.55 R14.1 27,34.7 23.73,31.43 JP4.3
SE0+5
  Top 0.61: U$22.3 77.8,35.55 R18.1 77,34.7 73.73,31.43 JP5.3
SE0+6
  Top 0.61: U$26.3 27.8,49.95 R26.1 27,49.1 23.73,45.83 JP6.3
SE0+7
  Top 0.61: U$30.3 77.8,49.95 R30.1 77,49.1 73.73,45.83 JP7.3
SE0+8
  Top 0.61: U$34.3 27.8,64.25 R34.1 27,63.4 23.73,60.13 JP8.3
SE0+9
  Top 0.61: U$38.3 77.8,64.35 R38.1 77,63.5 73.73,60.23 JP9.3
SE0+10
  Top 0.61: U$42.3 27.8,78.55 R42.1 27,77.7 23.73,74.43 JP11.3
SE0+11
  Top 0.61: U$46.3 77.8,78.55 R46.1 77,77.7 73.73,74.43 JP12.3
SE0+12
  Top 0.61: U$50.3 27.8,92.75 R50.1 27,91.9 23.73,88.63 JP13.3
SE0+13
  Top 0.61: U$54.3 77.8,92.85 R54.1 77,92 73.73,88.73 JP14.3
SE1+
  Top 0.61: U$2.3 37,6.75 R20.1 36.95,4.4 27.8,4.4 26.27,2.87 JP10.4
SE1+1
  Top 0.61: U$1.3 87,6.75 R1.1 86.95,4.4 77.8,4.4 76.27,2.87 JP1.4
SE1+2
  Top 0.61: U$8.3 37,21.15 R5.1 36.95,18.8 27.8,18.8 26.27,17.27 JP2.4
SE1+3
  Top 0.61: U$13.3 87,21.15 R9.1 86.95,18.8 77.8,18.8 76.27,17.27 JP3.4
SE1+4
  Top 0.61: U$17.3 37,35.55 R13.1 36.95,33.2 27.8,33.2 26.27,31.67 JP4.4
SE1+5
  Top 0.61: U$21.3 87,35.55 R17.1 86.95,33.2 77.8,33.2 76.27,31.67 JP5.4
SE1+6
  Top 0.61: U$25.3 37,49.95 R25.1 36.95,47.6 27.8,47.6 26.27,46.07 JP6.4
SE1+7
  Top 0.61: U$29.3 87,49.95 R29.1 86.95,47.6 77.8,47.6 76.27,46.07 JP7.4
SE1+8
  Top 0.61: U$33.3 37,64.25 R33.1 36.95,61.9 27.8,61.9 26.27,60.37 JP8.4
SE1+9
  Top 0.61: U$37.3 87,64.35 R37.1 86.95,62 77.8,62 76.27,60.47 JP9.4
SE1+10
  Top 0.61: U$41.3 37,78.55 R41.1 36.95,76.2 27.8,76.2 26.27,74.67 JP11.4
SE1+11
  Top 0.61: U$45.3 87,78.55 R45.1 86.95,76.2 77.8,76.2 76.27,74.67 JP12.4
SE1+12
  Top 0.61: U$49.3 37,92.75 R49.1 36.95,90.4 27.8,90.4 26.27,88.87 JP13.4
SE1+13
  Top 0.61: U$53.3 87,92.85 R53.1 86.95,90.5 77.8,90.5 76.27,88.97 JP14.4

## Text on the board
bNames: SD1 | SD0 | SE1 | VCC | GND | SD1 | SD0 | SE0 | SE1 | VCC | GND | SE0 | VCC | GND | VCC | GND | SD1 | SD0 | SE0 | SE1 | SD1 | SD0 | SE0 | SE1 | GND | VCC | GND | SD1 | SD0 | SE0 | SE1 | VCC | SD1 | SD0 | SE0 | SE1 | SD1 | SD0 | SE0 | SE1 | VCC | GND | SD1 | SD0 | SE0 | SE1 | VCC | GND | SD1 | SD0 | VCC | GND | SD1 | SD0 | VCC | GND | SE0 | SE1 | SE0 | SE1 | GND | GND | SD1 | SD0 | SE0 | SE1 | VCC | SD1 | SD0 | SE0 | SE1 | VCC | SD1 | SD0 | SE1 | VCC | GND | SD1 | SD0 | SE1 | VCC | GND | SE0 | SE0